# EAGLE board Schéma_projet_Routage_Pi3B+ (EAGLE 9.7.0)
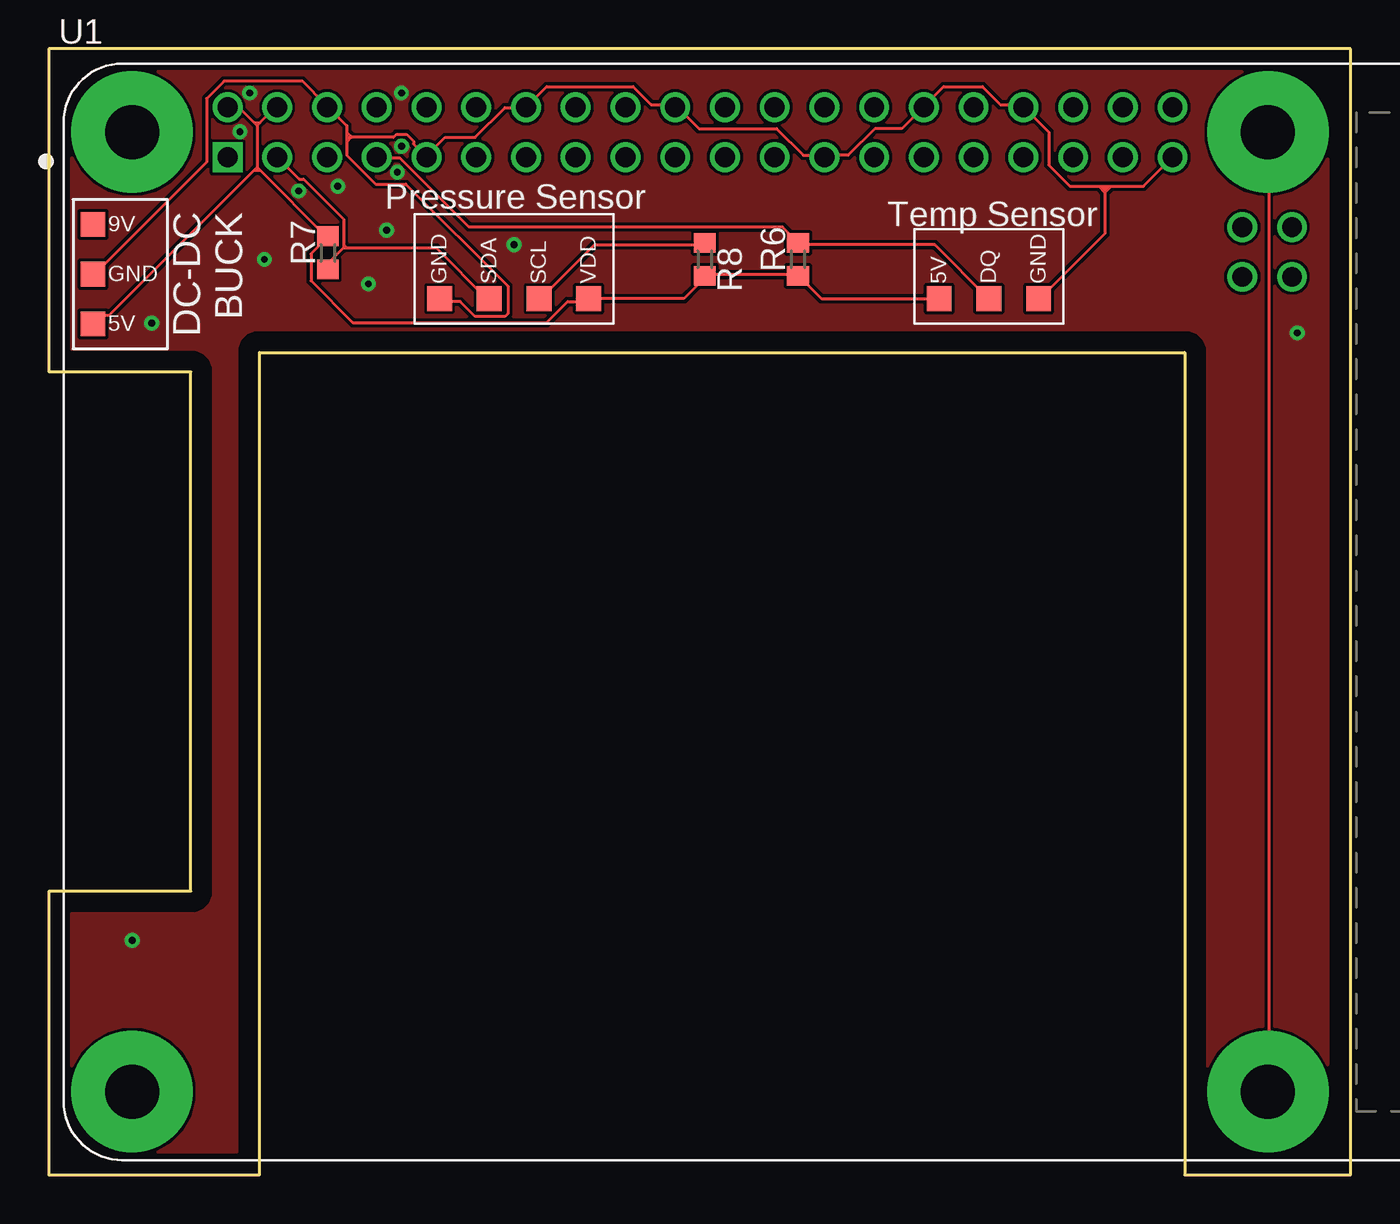
[diagram p0: board, top side]
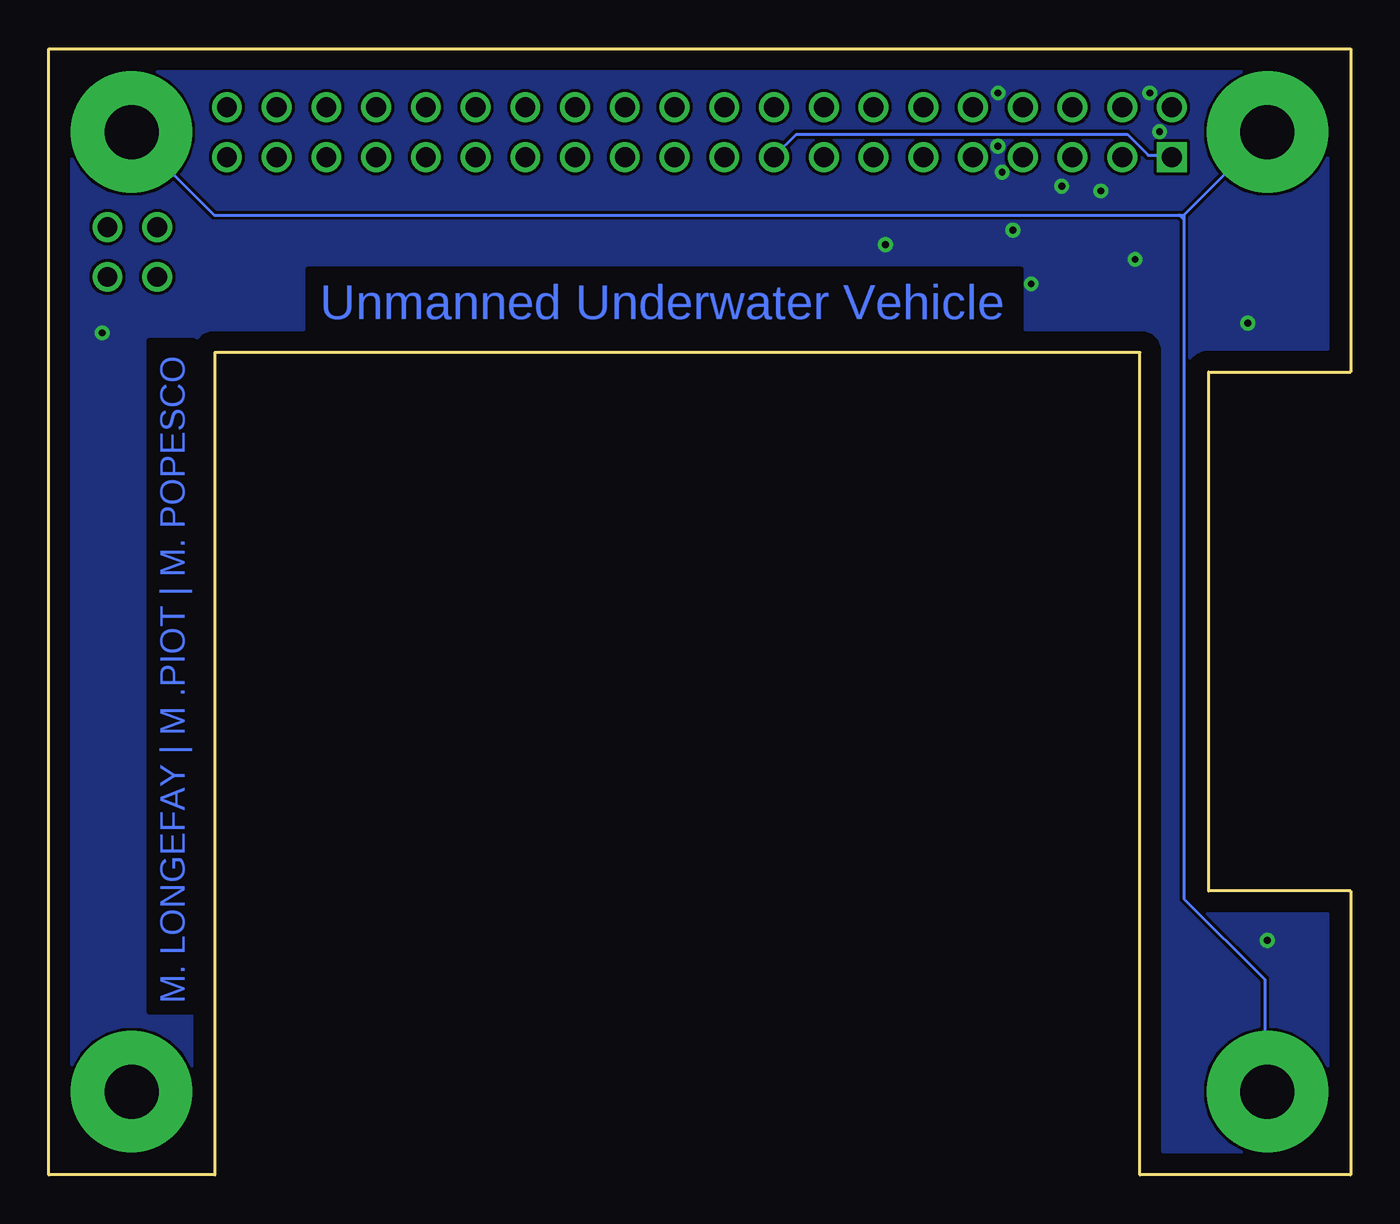
[diagram p1: board, bottom side, seen from below]

Size 66.47 x 57.5 mm. Coordinates in mm from the lower left corner, seen from the top.
Outline: 10.75,0 10.75,42 58,42 58,0 66.47,0 66.47,57.5 0,57.5 0,41 7.25,41 7.25,14.5 0,14.5 0,0 10.75,0
Copper layers (1*16): Top / Bottom
Stack-up Default Layer Stack: Top User Defined 0.035mm / Dielectric-1 User Defined 1.5mm / Bottom User Defined 0.035mm
Design rules "default": minimum track width 6mil, minimum drill 0.35mm, track to track 6mil, track to pad 6mil, pad to pad 6mil, via to via 6mil, smd to smd 6mil, copper to edge 40mil, drill to drill 6mil, minimum pad ring 10mil, minimum via ring 8mil, stop-mask expansion 4mil, vias tented up to drill 0mil, thermal gap 10mil

## Footprints (pad centres in the part's own frame; a part is rotated, then mirrored left to right if it is on the bottom)
R0603 = smd 1 x 1.1: 1 -0.85,0; 2 0.85,0
MODULE_RASPBERRY_PI_3_MODEL_B+ = drill 1.016 square: 1 -34.13,23.23 | drill 1.016: 2 -34.13,25.77; 3 -31.59,23.23; 4 -31.59,25.77; 5 -29.05,23.23; 6 -29.05,25.77; 7 -26.51,23.23; 8 -26.51,25.77; 9 -23.97,23.23; 10 -23.97,25.77; 11 -21.43,23.23; 12 -21.43,25.77; 13 -18.89,23.23; 14 -18.89,25.77; 15 -16.35,23.23; 16 -16.35,25.77; 17 -13.81,23.23; 18 -13.81,25.77; 19 -11.27,23.23; 20 -11.27,25.77; 21 -8.73,23.23; 22 -8.73,25.77; 23 -6.19,23.23; 24 -6.19,25.77; 25 -3.65,23.23; 26 -3.65,25.77; 27 -1.11,23.23; 28 -1.11,25.77; 29 1.43,23.23; 30 1.43,25.77; 31 3.97,23.23; 32 3.97,25.77; 33 6.51,23.23; 34 6.51,25.77; 35 9.05,23.23; 36 9.05,25.77; 37 11.59,23.23; 38 11.59,25.77; 39 14.13,23.23; 40 14.13,25.77; 41 20.23,17.107; 42 20.23,19.647; 43 17.69,17.107; 44 17.69,19.647 | drill 2.75 pad 6.2: S1 -39,24.5; S2 19,24.5; S3 19,-24.5; S4 -39,-24.5
DS18B20 = smd 1.27 x 1.27: P$1 -2.54,0; P$2 0,0; P$3 2.54,0
MS5837 = smd 1.27 x 1.27: P$1 -3.81,0; P$2 -1.27,0; P$3 1.27,0; P$4 3.81,0
DFR0753 = smd 1.27 x 1.27: P$1 -2.54,0; P$2 0,0; P$3 2.54,0

## Placement (x,y rotation side)
R6  4.7k  [R0603]  38.25,46.75 90 top
R7  4.7k  [R0603]  14.25,47.09 90 top
R8  4.7k  [R0603]  33.5,46.75 270 top
U1  RASPBERRY_PI_3_MODEL_B+  [MODULE_RASPBERRY_PI_3_MODEL_B+]  43.25,28.75 0 top
U$8  DS18B20  [DS18B20]  48,44.75 0 top
U$9  MS5837  [MS5837]  23.75,44.75 0 top
U$11  DFR0753  [DFR0753]  2.25,46 270 top

## Library data of the parts
R6-R8 = rcl; SPICEPREFIX: R
U1 = RASPBERRY_PI_3_MODEL_B_; MANUFACTURER: Raspberry Pi; MAXIMUM_PACKAGE_HEIGHT: 16 mm; PARTREV: N/A; SNAPEDA_PN: RASPBERRY PI 3 MODEL B+; STANDARD: Manufacturer Recommendations
U$8 U$9 = Bibliothèque_3S04
U$11 = Bibliothèque

## Nets
3V3: U1.1 U1.17
5V: R6.1 R7.2 R8.2 U1.2 U1.4 U$8.P$1 U$9.P$4 U$11.P$3
+9V: U$11.P$1
AGND: U1.6 U1.9 U1.14 U1.20 U1.25 U1.30 U1.34 U1.39 U$8.P$3 U$9.P$1 U$11.P$2
R3-GPIO04: R6.2 U1.7 U$8.P$2
R3-SCL: U1.5
R3-SDA: R7.1 U1.3 U$9.P$2
R3-SLC: R8.1 U$9.P$3
SHIELD: U1.S1 U1.S2 U1.S3 U1.S4

## Tracks (layer width: path | path; a pad name or v marks a point on that pad's centre or on a via)
3V3
  Bottom 0.152: U1.1 9.27,52.07 10.33,52.07 11.41,53.15 28.3,53.15 29.38,52.07 U1.17
5V
  Top 0.152: U$8.P$1 45.38,44.75 39.44,44.75 38.37,45.82 R6.1 38.22,45.97 33.65,45.97 R8.2 33.5,45.82 32.43,44.75 27.7,44.75 U$9.P$4 27.55,44.6 26.49,44.6 25.42,43.53 15.51,43.53 13.38,45.67 13.38,47.04 14.14,47.8 R7.2 14.14,47.95 10.8,51.3 | 10.64,51.46 10.8,51.3 | 10.64,53.59 10.64,51.46 | 10.77,53.73 11.55,54.51 U1.4 | 10.77,53.73 10.64,53.59 | 10.64,51.46 10.48,51.3 | 10.48,51.3 3.09,43.91 2.7,43.91 U$11.P$3 | 10.64,53.59 10.49,53.74 | 10.49,53.74 9.72,54.51 9.27,54.51 U1.2 | 10.48,51.3 10.8,51.3 | 10.49,53.74 10.76,53.74 10.77,53.73
AGND
  Top 0.152: U$8.P$3 50.61,44.75 53.93,48.07 53.93,50.17 | U$11.P$2 2.33,46 8.05,51.72 8.05,54.96 8.94,55.86 12.94,55.86 14.14,54.66 U1.6 14.29,54.51 15.21,53.59 15.21,53.25 | 15.21,53.25 15.21,52.98 | 15.21,52.98 15.21,52.75 | 15.21,52.75 15.21,52.07 16.68,50.6 18.22,50.6 23.44,45.38 23.44,43.99 23.29,43.84 21.76,43.84 21,44.6 20.09,44.6 U$9.P$1 | 53.93,50.17 53.93,50.31 | 53.61,50.49 52.14,50.49 51.06,51.57 51.06,53.25 49.8,54.51 U1.34 49.65,54.66 48.58,54.66 47.67,55.57 45.69,55.57 44.77,54.66 U1.30 44.62,54.51 43.55,53.44 42.18,53.44 40.81,52.07 39.74,52.07 U1.25 39.59,52.07 38.53,52.07 37.15,53.44 33.19,53.44 32.12,54.51 U1.20 31.97,54.66 30.75,54.66 29.84,55.57 25.42,55.57 24.5,54.66 U1.14 24.35,54.51 23.29,54.51 21.76,52.98 20.24,52.98 19.32,52.07 U1.9 18.62,52.64 18.62,52.79 18.26,53.15 17.76,53.15 17.59,52.98 15.48,52.98 | 53.61,50.49 53.75,50.49 | 53.75,50.49 54,50.49 | 54,50.49 54.25,50.49 | 54.25,50.49 55.89,50.49 U1.39 | 53.93,50.31 53.93,50.42 | 53.93,50.42 54,50.49 | 53.75,50.49 53.93,50.31 | 54.25,50.49 54.13,50.37 | 54.13,50.37 53.93,50.17 | 53.93,50.42 54.08,50.42 54.13,50.37 | 53.61,50.49 53.93,50.17 | 15.21,52.98 15.44,52.98 | 15.21,53.25 15.48,52.98 | 15.48,52.98 15.44,52.98 | 15.44,52.98 15.21,52.75
GND  (via drill 0.35)
  other vias: 11,46.75 17.25,48.25 14.75,50.5 12.75,50.25 9.75,53.27 10.25,55.25 18,55.25 23.75,47.5 63.75,43 5.25,43.5 17.79,51.21 18.01,52.54 4.25,11.97 16.31,45.5
  pour Top: -1,52.75 -1,5 6.62,-2.62 11.75,2.5 11.75,41.25 57.25,41.25 57.25,5.25 62.25,0.25 67.5,5.5 67.5,52 60.5,59 5.25,59
  pour Bottom: -1,52.75 -1,5 7.38,-3.38 12,1.25 12,41.25 57.25,41.25 57.25,5.5 62.5,0.25 67.5,5.25 67.5,52 60.5,59 5.25,59
R3-GPIO04
  Top 0.152: U$8.P$2 47.97,44.75 45.23,47.49 38.37,47.49 R6.2 38.22,47.65 37.46,48.41 21.45,48.41 17.94,51.91 16.89,51.91 U1.7
R3-SDA
  Top 0.152: 15.06,47.34 14.29,46.58 14.29,46.28 R7.1 | 15.06,47.5 15.06,47.34 | 15.06,47.34 15.21,47.34 | 15.21,47.34 19.77,47.34 22.36,44.75 22.37,44.75 U$9.P$2 | 15.06,47.5 15.21,47.34 | U1.3 12.78,50.86 13,50.86 15.06,48.8 15.06,47.5
R3-SLC
  Top 0.152: R8.1 33.5,47.49 27.86,47.49 25.11,44.75 U$9.P$3
SHIELD
  Top 0.152: U1.S3 62.3,4.37 62.3,53.13 U1.S2
  Bottom 0.152: 8.5,49.02 8.5,48.77 | 8.5,49.02 4.39,53.13 U1.S1 | 8.75,49.02 58.03,49.02 62.15,53.13 U1.S2 | 8.75,49.02 8.5,49.02 | 8.5,48.77 8.75,49.02 | U1.S4 4.39,4.39 4.39,9.99 8.5,14.1 8.5,48.77

## Text on the board
Bottom: Unmanned Underwater Vehicle | M. LONGEFAY | M .PIOT | M. POPESCO